# Altium PCB new_food_box_board.PcbDoc (part 2 of 2)
Units mil, origin at the board's own origin, x right, y up, seen from the top; angles counter-clockwise.
Board outline 2685 x 2040 mil, 4 copper layers (Top Layer, Int1 (GND), Int2 (PWR), Bottom Layer), stack 53.912 mil thick; 76 components, 57 nets, 292 pads, 22 vias.
Unrouted connection lines stored in the file: 200.
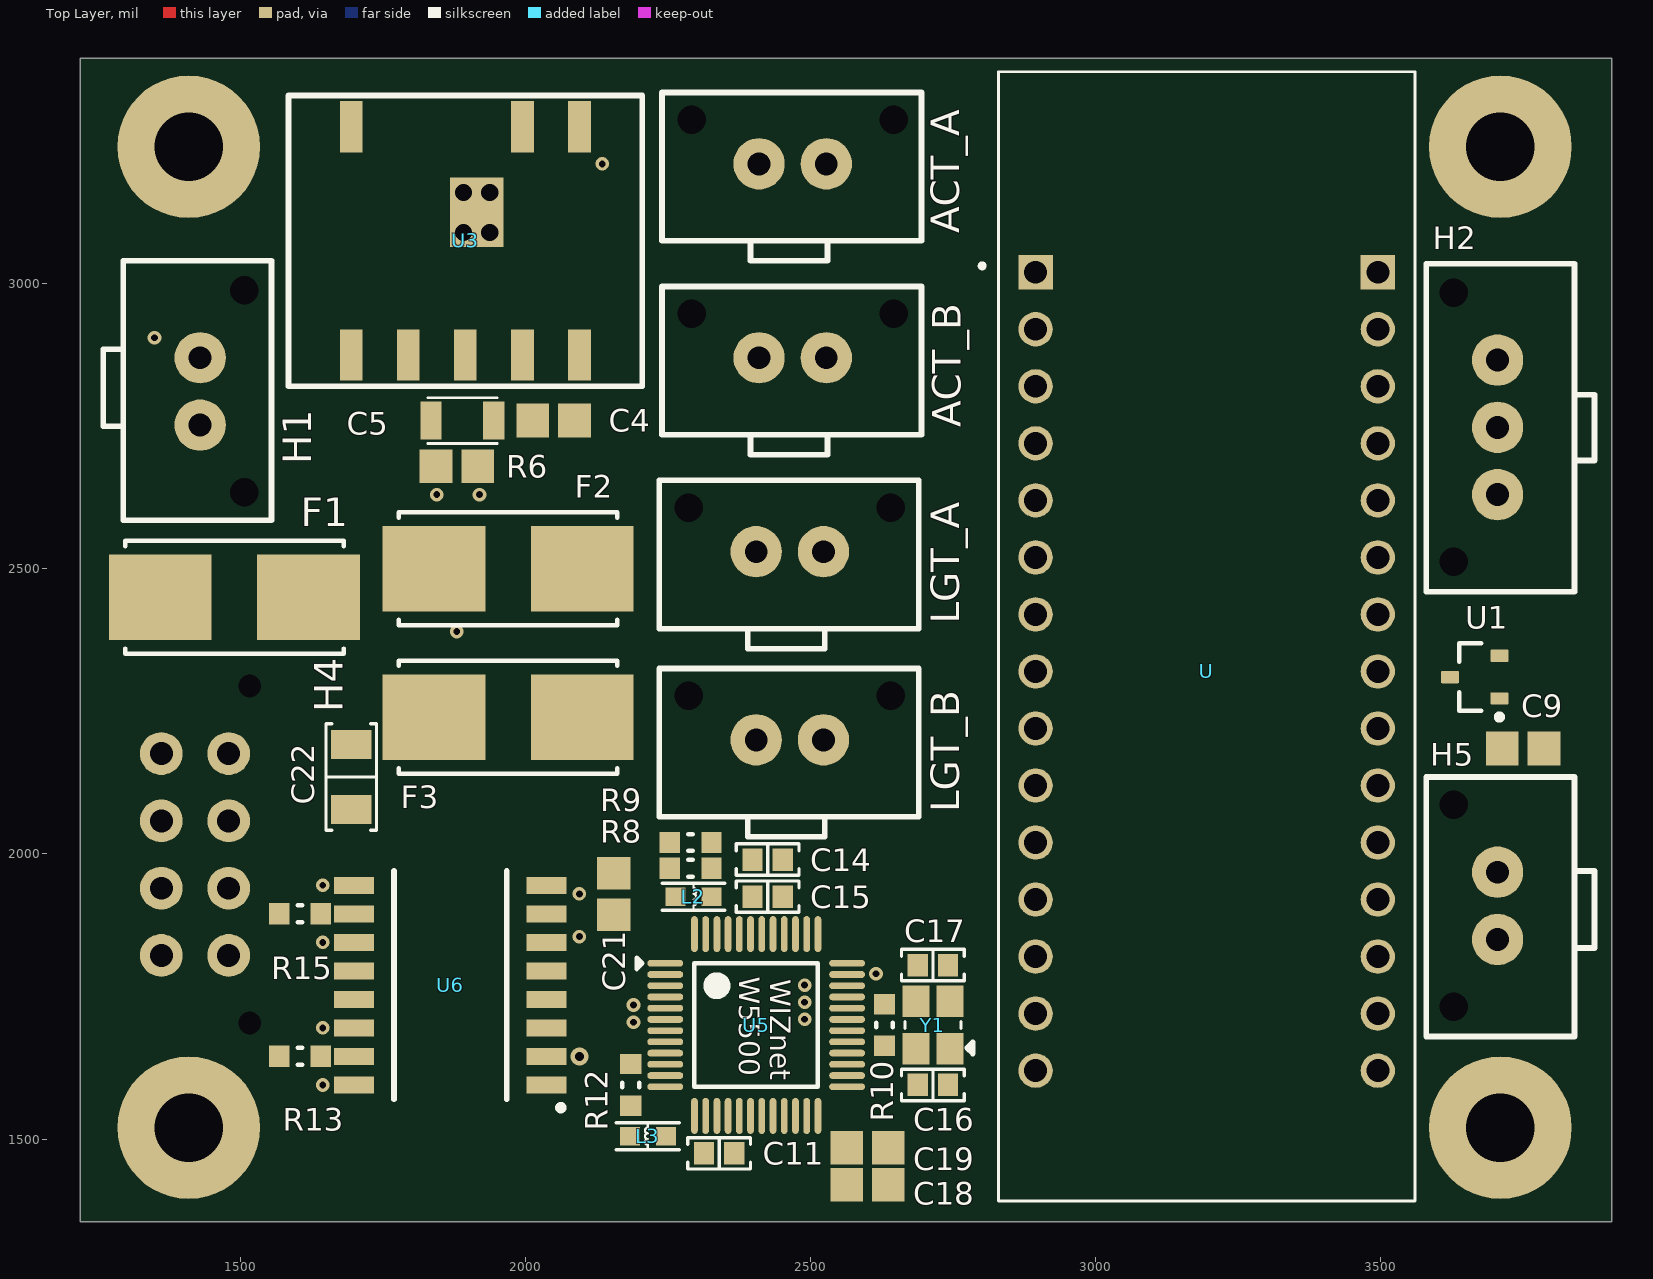
[diagram p0: Top Layer view]

## Part data (continued)
R2: "RES SMD 25.5K OHM 1% 1/10W 0603", Case Code (Imperial)=0603, Case Code (Metric)=1608, Manufacturer=Vishay, Manufacturer Part Number=CRCW060325K5FKEA, Max Operating Temperature=155°C, Max Power Dissipation=100mW, Min Operating Temperature=-55°C, Package Quantity=10, Resistance=25.5k, Supplier Part Number 1=541-25.5KHCT-ND, Temperature Coefficient=100ppm/°C, Tolerance=1%, Voltage Rating=75V, Case/Package=0603, Category="Chip SMD Resistors", ComponentLink1Description=https://datasheet.ciiva.com/11810/0900766b80d98afc-11810483.pdf?src-supplier=RSComponents, ComponentLink1URL=https://datasheet.ciiva.com/11810/0900766b80d98afc-11810483.pdf?src-supplier=RSComponents, ComponentLink2Description=https://datasheet.ciiva.com/2465/dcrcwe3-2465664.pdf?src-supplier=Digi-Key, ComponentLink2URL=https://datasheet.ciiva.com/2465/dcrcwe3-2465664.pdf?src-supplier=Digi-Key, ComponentLink3Description=https://datasheet.ciiva.com/2465/dcrcwe3-2465665.pdf?src-supplier=Digi-Key, ComponentLink3URL=https://datasheet.ciiva.com/2465/dcrcwe3-2465665.pdf?src-supplier=Digi-Key, ComponentLink4Description=https://datasheet.ciiva.com/3257/dcrcwe3-3257318.pdf?src-supplier=Avnet, ComponentLink4URL=https://datasheet.ciiva.com/3257/dcrcwe3-3257318.pdf?src-supplier=Avnet, ComponentLink5Description=https://datasheet.ciiva.com/3257/dcrcwe3-3257319.pdf?src-supplier=Avnet, ComponentLink5URL=https://datasheet.ciiva.com/3257/dcrcwe3-3257319.pdf?src-supplier=Avnet, ComponentLink6Description=https://datasheet.ciiva.com/16202/dcrcwe3-16202503.pdf?src-supplier=Future+Electronics, ComponentLink6URL=https://datasheet.ciiva.com/16202/dcrcwe3-16202503.pdf?src-supplier=Future+Electronics, ComponentLink7Description=https://datasheet.ciiva.com/7173/1635184-7173016.pdf?src-supplier=Newark, ComponentLink7URL=https://datasheet.ciiva.com/7173/1635184-7173016.pdf?src-supplier=Newark, ComponentLink8Description=https://datasheet.ciiva.com/16882/dcrcwe3-16882729.pdf?src-supplier=Avnet+Europe, ComponentLink8URL=https://datasheet.ciiva.com/16882/dcrcwe3-16882729.pdf?src-supplier=Avnet+Europe, ComponentLink9Description=https://datasheet.ciiva.com/22675/1847332-22675962.pdf?src-supplier=Element14, ComponentLink9URL=https://datasheet.ciiva.com/22675/1847332-22675962.pdf?src-supplier=Element14, ComponentLink10Description=https://datasheet.ciiva.com/22702/1697337-22702891.pdf?src-supplier=Element14, ComponentLink10URL=https://datasheet.ciiva.com/22702/1697337-22702891.pdf?src-supplier=Element14, ComponentLink11Description=https://datasheet.ciiva.com/22869/70201119-22869452.pdf?src-supplier=Allied+Electronics, ComponentLink11URL=https://datasheet.ciiva.com/22869/70201119-22869452.pdf?src-supplier=Allied+Electronics, ComponentLink12Description=https://datasheet.ciiva.com/2465/dcrcwe3-2465663.pdf?src-supplier=Digi-Key, ComponentLink12URL=https://datasheet.ciiva.com/2465/dcrcwe3-2465663.pdf?src-supplier=Digi-Key, ComponentLink13Description=https://datasheet.ciiva.com/5541/dcrcwe3-109170-5541965.pdf?src-supplier=Mouser, ComponentLink13URL=https://datasheet.ciiva.com/5541/dcrcwe3-109170-5541965.pdf?src-supplier=Mouser, Composition="Thick Film", Contact Plating=Tin, Depth=0.85mm, Features="Automotive AEC-Q200", Height=0.45mm, Lead Free="Lead Free", Length=1.55mm, Military Standard=Not, Number of Pins=2, Number of Terminations=2, Packaging="Tape and Reel", Power Rating=100mW, Pricing 1="1=0.10000, 10=0.03400, 100=0.01390, 1000=0.00623, 2500=0.00540 (USD)", Radiation Hardening=No, REACH SVHC=Unknown, Supplier 1=Digi-Key, Termination=SMD/SMT, Voltage Rating (DC)=75V, Weight=7.1E-05oz, Width=0.033inch, Working Voltage=75V
R3: "Res Thick Film 0603 13K Ohm 1% 1/10W 100ppm/C Molded SMD SMD Paper T/R", Case Code (Imperial)=0603, Case Code (Metric)=1608, Manufacturer="Vishay Dale", Manufacturer Part Number=CRCW060313K0FKTA, Max Operating Temperature=155°C, Max Power Dissipation=100mW, Min Operating Temperature=-55°C, Package Quantity=5000, Resistance=13k, Supplier Part Number 1=541-CRCW060313K0FKTACT-ND, Temperature Coefficient=100ppm/°C, Tolerance=1%, Voltage Rating=75V, Case/Package=0603, Category="Chip SMD Resistors", ComponentLink1Description=https://datasheet.ciiva.com/15159/getdatasheetpartid-33120-15159398.pdf?src-supplier=Verical, ComponentLink1URL=https://datasheet.ciiva.com/15159/getdatasheetpartid-33120-15159398.pdf?src-supplier=Verical, ComponentLink2Description=https://datasheet.ciiva.com/2564/dcrcw-2564949.pdf?src-supplier=Digi-Key, ComponentLink2URL=https://datasheet.ciiva.com/2564/dcrcw-2564949.pdf?src-supplier=Digi-Key, ComponentLink3Description=https://datasheet.ciiva.com/9043/dcrcw-9043261.pdf?src-supplier=Avnet, ComponentLink3URL=https://datasheet.ciiva.com/9043/dcrcw-9043261.pdf?src-supplier=Avnet, Composition="Thick Film", Contact Plating=Tin,Lead, Depth=0.85mm, Features="Automotive AEC-Q200", Height=0.02inch, Lead Free="Contains Lead", Length=1.55mm, Military Standard=Not, Number of Pins=2, Number of Terminations=2, Packaging="Tape and Reel", Power Dissipation=100mW, Power Rating=100mW, Pricing 1="1=0.13000, 10=0.12000, 100=0.04620, 1000=0.02033, 2500=0.01756 (USD)", Radiation Hardening=No, REACH SVHC=Unknown, Supplier 1=Digi-Key, Voltage Rating (DC)=75V, Weight=7.1E-05oz, Width=0.85mm
R4 "R11_Box Actuator A" "R11_Box Actuator B" "R11_Light A" "R11_Light B": library part "RES 0603", "CRGCQ 0603 100R 5%", Case Code (Imperial)=0603, Case Code (Metric)=1608, Manufacturer="TE Connectivity", Manufacturer Part Number=CRGCQ0603J100R, Max Operating Temperature=155°C, Max Power Dissipation=100mW, Min Operating Temperature=-55°C, Resistance=100R, Supplier Part Number 1=A130085CT-ND, Temperature Coefficient=100ppm/°C, Tolerance=5%, Case/Package=0603, Category="Chip SMD Resistors", ComponentLink1Description=https://www.te.com/commerce/DocumentDelivery/DDEController?Action=srchrtrv&amp;DocNm=1773204-3&amp;DocType=DS&amp;DocLang=English&src-supplier=Digi-Key, ComponentLink1URL=https://www.te.com/commerce/DocumentDelivery/DDEController?Action=srchrtrv&amp;DocNm=1773204-3&amp;DocType=DS&amp;DocLang=English&src-supplier=Digi-Key, Composition="Thick Film", Features="Moisture Resistant,Automotive AEC-Q200", Number of Terminations=2, Packaging="Cut Tape", Pricing 1="1=0.10000, 10=0.02100, 100=0.00860, 1000=0.00387, 2500=0.00336 (USD)", Supplier 1=Digi-Key
R5 "R14_Box Actuator A" "R14_Box Actuator B" "R14_Light A" "R14_Light B": library part "RES 0603", "TE CONNECTIVITY - CRGCQ0603J10K - RES, 10K, 5%, 0603, THICK FILM", Case Code (Imperial)=0603, Case Code (Metric)=1608, Manufacturer="TE Connectivity", Manufacturer Part Number=CRGCQ0603J10K, Max Operating Temperature=155°C, Max Power Dissipation=100mW, Min Operating Temperature=-55°C, Resistance=10kR, Supplier Part Number 1=A130097CT-ND, Temperature Coefficient=100ppm/°C, Tolerance=5%, Case/Package=0603, Category="Chip SMD Resistors", ComponentLink1Description=https://4donline.ihs.com/images/VipMasterIC/IC/TYEL/TYEL-S-A0004929575/TYEL-S-A0004929575-1.pdf?hkey=52A5661711E402568146F3353EA87419&src-supplier=Farnell, ComponentLink1URL=https://4donline.ihs.com/images/VipMasterIC/IC/TYEL/TYEL-S-A0004929575/TYEL-S-A0004929575-1.pdf?hkey=52A5661711E402568146F3353EA87419&src-supplier=Farnell, ComponentLink2Description=https://4donline.ihs.com/images/VipMasterIC/IC/TYEL/TYEL-S-A0004929575/TYEL-S-A0004929575-1.pdf?hkey=52A5661711E402568146F3353EA87419&src-supplier=Newark, ComponentLink2URL=https://4donline.ihs.com/images/VipMasterIC/IC/TYEL/TYEL-S-A0004929575/TYEL-S-A0004929575-1.pdf?hkey=52A5661711E402568146F3353EA87419&src-supplier=Newark, ComponentLink3Description=https://www.te.com/commerce/DocumentDelivery/DDEController?Action=srchrtrv&amp;DocNm=1773204-3&amp;DocType=DS&amp;DocLang=English&src-supplier=Digi-Key, ComponentLink3URL=https://www.te.com/commerce/DocumentDelivery/DDEController?Action=srchrtrv&amp;DocNm=1773204-3&amp;DocType=DS&amp;DocLang=English&src-supplier=Digi-Key, ComponentLink4Description=http://www.te.com/commerce/DocumentDelivery/DDEController?Action=srchrtrv&DocNm=1773204-3&DocType=DS&DocLang=English&src-supplier=Digi-Key, ComponentLink4URL=http://www.te.com/commerce/DocumentDelivery/DDEController?Action=srchrtrv&DocNm=1773204-3&DocType=DS&DocLang=English&src-supplier=Digi-Key, Composition="Thick Film", Features="Moisture Resistant,Automotive AEC-Q200", Number of Terminations=2, Packaging="Tape and Reel", Pricing 1="1=0.10000, 10=0.02100, 100=0.00860, 1000=0.00387, 2500=0.00336 (USD)", Supplier 1=Digi-Key
R6: library part "RES 0603", "Resistor Thick Film 0.01Ohm 0.5% 0.5W 2-Pin 0805 T/R", Manufacturer=Panasonic, Manufacturer Part Number=ERJ-6CWDR010V, Supplier Part Number 1=P124401CT-ND, Pricing 1="1=0.65000, 10=0.48100, 25=0.39000, 50=0.33920, 100=0.27990, 250=0.24312, 500=0.19790, 1000=0.15696 (USD)", Supplier 1=Digi-Key
R7: library part "RES 0603", "CRGCQ 0603 100K 5%", Case Code (Imperial)=0603, Case Code (Metric)=1608, Manufacturer="TE Connectivity", Manufacturer Part Number=CRGCQ0603J100K, Max Operating Temperature=155°C, Max Power Dissipation=100mW, Min Operating Temperature=-55°C, Resistance=100k, Supplier Part Number 1=A130103CT-ND, Temperature Coefficient=100ppm/°C, Tolerance=5%, Case/Package=0603, Category="Chip SMD Resistors", ComponentLink1Description=https://www.te.com/commerce/DocumentDelivery/DDEController?Action=srchrtrv&amp;DocNm=1773204-3&amp;DocType=DS&amp;DocLang=English&src-supplier=Digi-Key, ComponentLink1URL=https://www.te.com/commerce/DocumentDelivery/DDEController?Action=srchrtrv&amp;DocNm=1773204-3&amp;DocType=DS&amp;DocLang=English&src-supplier=Digi-Key, ComponentLink2Description=https://4donline.ihs.com/images/VipMasterIC/IC/TYEL/TYEL-S-A0004929575/TYEL-S-A0004929575-1.pdf?hkey=52A5661711E402568146F3353EA87419&src-supplier=Farnell, ComponentLink2URL=https://4donline.ihs.com/images/VipMasterIC/IC/TYEL/TYEL-S-A0004929575/TYEL-S-A0004929575-1.pdf?hkey=52A5661711E402568146F3353EA87419&src-supplier=Farnell, ComponentLink3Description=https://4donline.ihs.com/images/VipMasterIC/IC/TYEL/TYEL-S-A0004929575/TYEL-S-A0004929575-1.pdf?hkey=52A5661711E402568146F3353EA87419&src-supplier=Newark, ComponentLink3URL=https://4donline.ihs.com/images/VipMasterIC/IC/TYEL/TYEL-S-A0004929575/TYEL-S-A0004929575-1.pdf?hkey=52A5661711E402568146F3353EA87419&src-supplier=Newark, ComponentLink4Description=https://4donline.ihs.com/images/VipMasterIC/IC/TYEL/TYEL-S-A0004929575/TYEL-S-A0004929575-1.pdf?hkey=52A5661711E402568146F3353EA87419&src-supplier=Element14, ComponentLink4URL=https://4donline.ihs.com/images/VipMasterIC/IC/TYEL/TYEL-S-A0004929575/TYEL-S-A0004929575-1.pdf?hkey=52A5661711E402568146F3353EA87419&src-supplier=Element14, Composition="Thick Film", Features="Moisture Resistant,Automotive AEC-Q200", Number of Terminations=2, Packaging="Tape and Reel", Pricing 1="1=0.10000, 10=0.02100, 100=0.00860, 1000=0.00387, 2500=0.00336 (USD)", Supplier 1=Digi-Key
R8 R9: library part "RES 0603", "SMD Resistor, Thick film 4.7 kOhm,  ±  1 %, 0603, CRCW06034K70FKEA, Vishay", Case Code (Imperial)=0603, Case Code (Metric)=1608, Manufacturer=Vishay, Manufacturer Part Number=CRCW06034K70FKEA, Max Operating Temperature=155°C, Min Operating Temperature=-55°C, Package Quantity=5000, Power Rating=100mW, Resistance=4.7kR, Supplier Part Number 1=541-4.70KHCT-ND, Temperature Coefficient=100ppm/°C, Tolerance=1%, Voltage Rating=75V, Case/Package=0603, Category="Chip SMD Resistors", ComponentLink1Description=https://datasheet.ciiva.com/11809/0900766b80d98afc-11809859.pdf?src-supplier=RSComponents, ComponentLink1URL=https://datasheet.ciiva.com/11809/0900766b80d98afc-11809859.pdf?src-supplier=RSComponents, ComponentLink2Description=https://datasheet.ciiva.com/16520/dcrcwe3-16520616.pdf?src-supplier=Avnet+Asia, ComponentLink2URL=https://datasheet.ciiva.com/16520/dcrcwe3-16520616.pdf?src-supplier=Avnet+Asia, ComponentLink3Description=https://datasheet.ciiva.com/8079/1697337-8079646.pdf?src-supplier=Element14, ComponentLink3URL=https://datasheet.ciiva.com/8079/1697337-8079646.pdf?src-supplier=Element14, ComponentLink4Description=https://datasheet.ciiva.com/26314/fld-crcw-e3-data-en-26314735.pdf?src-supplier=Distrelec, ComponentLink4URL=https://datasheet.ciiva.com/26314/fld-crcw-e3-data-en-26314735.pdf?src-supplier=Distrelec, ComponentLink5Description=https://datasheet.ciiva.com/15159/getdatasheetpartid-33073-15159382.pdf?src-supplier=Verical, ComponentLink5URL=https://datasheet.ciiva.com/15159/getdatasheetpartid-33073-15159382.pdf?src-supplier=Verical, ComponentLink6Description=https://datasheet.ciiva.com/16199/dcrcwe3-16199366.pdf?src-supplier=Future+Electronics, ComponentLink6URL=https://datasheet.ciiva.com/16199/dcrcwe3-16199366.pdf?src-supplier=Future+Electronics, ComponentLink7Description=https://datasheet.ciiva.com/16764/70201119-16764918.pdf?src-supplier=Allied+Electronics, ComponentLink7URL=https://datasheet.ciiva.com/16764/70201119-16764918.pdf?src-supplier=Allied+Electronics, ComponentLink8Description=https://datasheet.ciiva.com/16724/70201119-16724106.pdf?src-supplier=Allied+Electronics, ComponentLink8URL=https://datasheet.ciiva.com/16724/70201119-16724106.pdf?src-supplier=Allied+Electronics, Composition="Thick Film", Contact Plating=Tin, Depth=0.85mm, Height=0.45mm, Lead Free="Lead Free", Length=1.55mm, Military Standard=Not, Mount="Surface Mount", Packaging="Tape and Reel", REACH SVHC=Unknown, Supplier 1=Digi-Key, Termination=SMD/SMT, Voltage Rating (DC)=75V, Weight=7.1E-05oz, Width=0.85mm
R10: library part "RES 0603", "Thick Film Chip Resistor", Case Code (Imperial)=0603, Case Code (Metric)=1608, Manufacturer=Vishay, Manufacturer Part Number=CRCW06031M00FKEA, Max Operating Temperature=155°C, Max Power Dissipation=100mW, Min Operating Temperature=-55°C, Package Quantity=10, Resistance=1MR, Supplier Part Number 1=541-1.00MHCT-ND, Temperature Coefficient=100ppm/°C, Tolerance=1%, Voltage Rating=75V, Case/Package=0603, Category="Chip SMD Resistors", ComponentLink1Description=https://datasheet.ciiva.com/11809/0900766b80d98afc-11809074.pdf?src-supplier=RSComponents, ComponentLink1URL=https://datasheet.ciiva.com/11809/0900766b80d98afc-11809074.pdf?src-supplier=RSComponents, ComponentLink2Description=https://datasheet.ciiva.com/2465/dcrcwe3-2465549.pdf?src-supplier=Digi-Key, ComponentLink2URL=https://datasheet.ciiva.com/2465/dcrcwe3-2465549.pdf?src-supplier=Digi-Key, ComponentLink3Description=https://datasheet.ciiva.com/16311/dcrcwe3-16311533.pdf?src-supplier=Future+Electronics, ComponentLink3URL=https://datasheet.ciiva.com/16311/dcrcwe3-16311533.pdf?src-supplier=Future+Electronics, ComponentLink4Description=https://datasheet.ciiva.com/2465/dcrcwe3-2465550.pdf?src-supplier=Digi-Key, ComponentLink4URL=https://datasheet.ciiva.com/2465/dcrcwe3-2465550.pdf?src-supplier=Digi-Key, ComponentLink5Description=https://datasheet.ciiva.com/26314/fld-crcw-e3-data-en-26314645.pdf?src-supplier=Distrelec, ComponentLink5URL=https://datasheet.ciiva.com/26314/fld-crcw-e3-data-en-26314645.pdf?src-supplier=Distrelec, ComponentLink6Description=https://datasheet.ciiva.com/7841/1720486-7841822.pdf?src-supplier=Element14, ComponentLink6URL=https://datasheet.ciiva.com/7841/1720486-7841822.pdf?src-supplier=Element14, ComponentLink7Description=https://datasheet.ciiva.com/2465/dcrcwe3-2465551.pdf?src-supplier=Digi-Key, ComponentLink7URL=https://datasheet.ciiva.com/2465/dcrcwe3-2465551.pdf?src-supplier=Digi-Key, ComponentLink8Description=https://datasheet.ciiva.com/7841/125364-7841823.pdf?src-supplier=Element14, ComponentLink8URL=https://datasheet.ciiva.com/7841/125364-7841823.pdf?src-supplier=Element14, Composition="Thick Film", Contact Plating=Tin, Depth=0.85mm, Features="Automotive AEC-Q200", Height=0.45mm, Lead Free="Lead Free", Length=1.55mm, Military Standard=Not, Mount="Surface Mount", Number of Pins=2, Number of Terminations=2, Packaging="Tape and Reel", Power Rating=100mW, Radiation Hardening=No, REACH SVHC=Unknown, Supplier 1=Digi-Key, Termination=SMD/SMT, Voltage Rating (DC)=75V, Weight=7.1E-05oz, Width=0.85mm
R12: library part "RES 0603", "Res Thick Film 0603 12.4K Ohm 1% 1/10W ±100ppm/°C Molded SMD SMD Paper T/R", Case Code (Imperial)=0603, Case Code (Metric)=1608, Manufacturer=Vishay, Manufacturer Part Number=CRCW0603-12K4FKEA, Max Operating Temperature=155°C, Max Power Dissipation=100mW, Min Operating Temperature=-55°C, Package Quantity=10, Resistance=12.4kR, Supplier Part Number 1=541-12.4KHTR-ND, Temperature Coefficient=100ppm/°C, Tolerance=1%, Voltage Rating=75V, Case/Package=0603, Category="Chip SMD Resistors", ComponentLink1Description=https://datasheet.ciiva.com/11809/0900766b80d98afc-11809065.pdf?src-supplier=RSComponents, ComponentLink1URL=https://datasheet.ciiva.com/11809/0900766b80d98afc-11809065.pdf?src-supplier=RSComponents, ComponentLink2Description=https://datasheet.ciiva.com/16215/dcrcwe3-16215547.pdf?src-supplier=Future+Electronics, ComponentLink2URL=https://datasheet.ciiva.com/16215/dcrcwe3-16215547.pdf?src-supplier=Future+Electronics, ComponentLink3Description=https://datasheet.ciiva.com/16515/dcrcwe3-16515035.pdf?src-supplier=Avnet+Asia, ComponentLink3URL=https://datasheet.ciiva.com/16515/dcrcwe3-16515035.pdf?src-supplier=Avnet+Asia, ComponentLink4Description=https://datasheet.ciiva.com/2465/dcrcwe3-2465806.pdf?src-supplier=Digi-Key, ComponentLink4URL=https://datasheet.ciiva.com/2465/dcrcwe3-2465806.pdf?src-supplier=Digi-Key, ComponentLink5Description=https://datasheet.ciiva.com/16767/70201119-16767174.pdf?src-supplier=Allied+Electronics, ComponentLink5URL=https://datasheet.ciiva.com/16767/70201119-16767174.pdf?src-supplier=Allied+Electronics, ComponentLink6Description=https://datasheet.ciiva.com/5543/dcrcwe3-109170-5543127.pdf?src-supplier=Mouser, ComponentLink6URL=https://datasheet.ciiva.com/5543/dcrcwe3-109170-5543127.pdf?src-supplier=Mouser, ComponentLink7Description=https://datasheet.ciiva.com/16778/70201119-16778295.pdf?src-supplier=Allied+Electronics, ComponentLink7URL=https://datasheet.ciiva.com/16778/70201119-16778295.pdf?src-supplier=Allied+Electronics, ComponentLink8Description=https://datasheet.ciiva.com/3257/dcrcwe3-3257002.pdf?src-supplier=Avnet, ComponentLink8URL=https://datasheet.ciiva.com/3257/dcrcwe3-3257002.pdf?src-supplier=Avnet, ComponentLink9Description=https://datasheet.ciiva.com/2465/dcrcwe3-2465804.pdf?src-supplier=Digi-Key, ComponentLink9URL=https://datasheet.ciiva.com/2465/dcrcwe3-2465804.pdf?src-supplier=Digi-Key, ComponentLink10Description=https://datasheet.ciiva.com/2465/dcrcwe3-2465805.pdf?src-supplier=Digi-Key, ComponentLink10URL=https://datasheet.ciiva.com/2465/dcrcwe3-2465805.pdf?src-supplier=Digi-Key, Composition="Thick Film", Contact Plating=Tin, Depth=0.85mm, Features="Automotive AEC-Q200", Height=0.45mm, Lead Free="Lead Free", Length=1.55mm, Military Standard=Not, Mount="Surface Mount", Number of Pins=2, Number of Terminations=2, Packaging="Tape and Reel", Power Rating=100mW, Radiation Hardening=No, REACH SVHC=Unknown, Supplier 1=Digi-Key, Termination=SMD/SMT, Voltage Rating (DC)=75V, Weight=7.1E-05oz, Width=0.85mm
R13 R15: library part "RES 0603", "VISHAY - CRCW060375R0FKEA - RES, 75R, 1%, 0.1W, 0603, THICK FILM", Case Code (Imperial)=0603, Case Code (Metric)=1608, Manufacturer=Vishay, Manufacturer Part Number=CRCW060375R0FKEA, Max Operating Temperature=155°C, Min Operating Temperature=-55°C, Package Quantity=5000, Power Rating=100mW, Resistance=75R, Supplier Part Number 1=541-75.0HCT-ND, Temperature Coefficient=100ppm/°C, Tolerance=1%, Voltage Rating=75V, Case/Package=0603, Category="Chip SMD Resistors", ComponentLink1Description=https://datasheet.ciiva.com/11809/0900766b80d98afc-11809100.pdf?src-supplier=RSComponents, ComponentLink1URL=https://datasheet.ciiva.com/11809/0900766b80d98afc-11809100.pdf?src-supplier=RSComponents, ComponentLink2Description=https://datasheet.ciiva.com/7673/1697337-7673323.pdf?src-supplier=Element14, ComponentLink2URL=https://datasheet.ciiva.com/7673/1697337-7673323.pdf?src-supplier=Element14, ComponentLink3Description=https://datasheet.ciiva.com/16852/dcrcwe3-16852747.pdf?src-supplier=Avnet+Europe, ComponentLink3URL=https://datasheet.ciiva.com/16852/dcrcwe3-16852747.pdf?src-supplier=Avnet+Europe, ComponentLink4Description=https://datasheet.ciiva.com/3257/dcrcwe3-3257884.pdf?src-supplier=Avnet, ComponentLink4URL=https://datasheet.ciiva.com/3257/dcrcwe3-3257884.pdf?src-supplier=Avnet, ComponentLink5Description=https://datasheet.ciiva.com/3257/dcrcwe3-3257885.pdf?src-supplier=Avnet, ComponentLink5URL=https://datasheet.ciiva.com/3257/dcrcwe3-3257885.pdf?src-supplier=Avnet, ComponentLink6Description=https://datasheet.ciiva.com/16780/70201119-16780254.pdf?src-supplier=Allied+Electronics, ComponentLink6URL=https://datasheet.ciiva.com/16780/70201119-16780254.pdf?src-supplier=Allied+Electronics, ComponentLink7Description=https://datasheet.ciiva.com/5541/dcrcwe3-109170-5541910.pdf?src-supplier=Mouser, ComponentLink7URL=https://datasheet.ciiva.com/5541/dcrcwe3-109170-5541910.pdf?src-supplier=Mouser, ComponentLink8Description=https://datasheet.ciiva.com/16199/dcrcwe3-16199141.pdf?src-supplier=Future+Electronics, ComponentLink8URL=https://datasheet.ciiva.com/16199/dcrcwe3-16199141.pdf?src-supplier=Future+Electronics, ComponentLink9Description=https://datasheet.ciiva.com/16722/70201119-16722522.pdf?src-supplier=Allied+Electronics, ComponentLink9URL=https://datasheet.ciiva.com/16722/70201119-16722522.pdf?src-supplier=Allied+Electronics, ComponentLink10Description=https://datasheet.ciiva.com/7673/1697337-7673471.pdf?src-supplier=Element14, ComponentLink10URL=https://datasheet.ciiva.com/7673/1697337-7673471.pdf?src-supplier=Element14, Composition="Thick Film", Contact Plating=Tin, Depth=0.85mm, Height=0.45mm, Lead Free="Lead Free", Length=1.55mm, Military Standard=Not, Number of Terminations=2, Packaging="Tape and Reel", REACH SVHC=Unknown, Supplier 1=Digi-Key, Termination=SMD/SMT, Voltage Rating (DC)=75V, Weight=7.1E-05oz, Width=0.85mm, Working Voltage=75V
U: "STM32L432KC, mbed-Enabled Development Nucleo-32 STM32L4 ARMÂ® CortexÂ®-M4 MCU 32-Bit Embedded Evaluation Board", Package=None, Availability=Unavailable, MF=STMicroelectronics, MP=NUCLEO-L432KC, Price=None, SnapEDA_Link=https://www.snapeda.com/parts/NUCLEO-L432KC/STMicroelectronics/view-part/628463/?ref=snap
U1: library part CMP-0066-00260-3, "2.7V Temperature Sensor, 3-pin SOT-23, Pb-Free", Manufacturer="Texas Instruments", PackageTopMarking=T1C*XTT, PowerWise=N, ComponentLink1Description="Datasheet URL", ComponentLink1URL=http://www.ti.com/general/docs/lit/getliterature.tsp?genericPartNumber=LM61&fileType=pdf, CompType="Temp Sensor IC", PackageDescription="Molded SOT-23, .115 x .051 x .037in Body, 3 Lead, .075 in Pitch", PackageReference=DBZ0003A, PinCount=3, RoHS=Y
U5: "WIZnet W5500"
Y1: library part OSC-82J0626-25MHz, "CRYSTAL 25.0000MHZ 18PF SMD", Case/Package=SMD/SMT, ESR (Equivalent Series Resistance)=50R, Frequency Stability=30ppm, Frequency Tolerance=50ppm, Load Capacitance=18pF, Manufacturer=Epson, Manufacturer Part Number=FA-23825.0000MB-C3, Max Operating Temperature=70°C, Min Operating Temperature=-20°C, Package Quantity=250, Supplier Part Number 1=SER3691CT-ND, Category=Crystals, ComponentLink1Description=http://www.mouser.com/ds/2/137/A-238_en-932914.pdf?src-supplier=Mouser, ComponentLink1URL=http://www.mouser.com/ds/2/137/A-238_en-932914.pdf?src-supplier=Mouser, ComponentLink2Description=https://www5.epsondevice.com/en/information/support/pdf/june_2018_psc_masterbook.pdf?src-supplier=Digi-Key, ComponentLink2URL=https://www5.epsondevice.com/en/information/support/pdf/june_2018_psc_masterbook.pdf?src-supplier=Digi-Key, Frequency=25MHz, Height=0.028inch, Lead Free="Lead Free", Length=0.126inch, Mount="Surface Mount", Packaging="Tape and Reel", Supplier 1=Digi-Key, Termination=SMD/SMT, Tolerance=50ppm, Weight=0.000564oz, Width=0.098inch

## Free pads (board coordinates)
  round 250 hole 120: 0(1410,1520) 0(1410,3240) 0(3710,1520) 0(3710,3240)

## Via types
v1: diameter 24, hole 12, Top Layer to Bottom Layer, 17 vias
v2: diameter 30, hole 30, Top Layer to Bottom Layer, 4 vias
v3: diameter 32, hole 16, Top Layer to Bottom Layer, 1 vias

## Nets (pads, with @x,y where several pads share a name; then routed paths per layer and width w, separated by ;. In a path a pad name is that pad's centre, name@x,y a point inside that pad or via, vN(x,y) a via of type N, cw(c..) or ccw(c..) an arc to the next point about the centre after c; other vN are vias at no path point)
3.3V: C13.1 C14.2 C15.2 L2.2 R8.2 R9.2 U5.28 U5.43 U5.44 U5.45
3.3V_A: C11.2 C12.1 L2.1 U5.4 U5.8 U5.11 U5.15 U5.17 U5.21
3V3: C4.2 C9.2 C10.2 H2.1 R7.2 U1.1 U3.4 U4.3 U.CN4_14
6V: C6.2 C7.2 D2.2 H1.1 L1.2 R1.2
  other v1: 1350,2905 2135,3210
24V: C2.2 C3.2 C5.2 F1.2 F2.1 F3.1 R6.2 U2.2 U3.3 U4.4
  other v1: 1845,2630
AGND: C11.1 C12.2 L3.1 U5.3 U5.9 U5.14 U5.16 U5.19 U5.48
CHP_RX_N: U5.5 U6.8
  other v1: 2190,1735 2095,1930
CHP_RX_P: U5.6 U6.6
  other v1: 2190,1705 2095,1855
CHP_TX_N: U5.1 U6.3
CHP_TX_P: U5.2 U6.1
CS: R8.1 U5.32 U.CN3_13
  other v1: 2490,1710
ETH_RX_N: H4.3 U6.9
  other v1: 1645,1945
ETH_RX_P: H4.2 U6.11
  other v1: 1645,1845
ETH_TX_N: H4.7 U6.14
  other v1: 1645,1695
ETH_TX_P: H4.6 U6.16
  other v1: 1645,1595
FB: R1.1 R3.2 U2.5
GND: "Q4_Box Actuator A.3" "Q4_Box Actuator B.3" "Q4_Light A.3" "Q4_Light B.3" "R14_Box Actuator A.1" "R14_Box Actuator B.1" "R14_Light A.1" "R14_Light B.1" C2.1 C3.1 C4.1 C5.1 C6.1 C7.1 C8.1 C9.1 C10.1 C13.2 C14.1 C15.1 C16.1 C17.1 C18.1 C19.1 C20.1 C21.1 C22.1 D1.1 H2.3 H4.1 H4.5 H5.2 L3.2 Q1.3 R2.1 R3.1 R5.1 R12.1 U1.3 U2.7 U3.2 U4.1 U5.23 U5.29 U5.38 U5.39 U5.40 U5.41 U5.42 U.CN3_4 U.CN4_2 Y1.2 Y1.4
  other v2: 1891.81,3090 1937.81,3090 1891.81,3160 1937.81,3160
MISO: U5.34 U.CN3_15
  other v1: 2490,1770
MOSI: U5.35 U.CN3_14
  other v1: 2615,1790
NetC1_1: C1.1 U2.1
NetC1_2: C1.2 D1.2 L1.1 U2.8
NetC8_2: C8.2 U2.6
NetC18_2: C18.2 U5.20
NetC19_2: C19.2 U5.22
NetC20_2: C20.2 C21.2 U6.2 U6.7
  other v3: 2095,1645
NetC22_2: C22.2 R13.1 R15.1
NetD2_1: D2.1 H1.2 Q1.1
"NetD5_Box Actuator A_1": "D5_Box Actuator A.1" "Q4_Box Actuator A.1" ACT_A.2
"NetD5_Box Actuator B_1": "D5_Box Actuator B.1" "Q4_Box Actuator B.1" ACT_B.2
"NetD5_Light A_1": "D5_Light A.1" "Q4_Light A.1" LGT_A.2
"NetD5_Light A_2": "D5_Light A.2" F2.2 LGT_A.1
"NetD5_Light B_1": "D5_Light B.1" "Q4_Light B.1" LGT_B.2
"NetD5_Light B_2": "D5_Light B.2" F3.2 LGT_B.1
NetF1_1: F1.1 H4.4 H4.8
NetH2_2: H2.2 U.CN4_5
NetH5_1: H5.1 R7.1 U.CN3_5
NetQ1_2: Q1.2 R4.1
"NetQ4_Box Actuator A_2": "Q4_Box Actuator A.2" "R11_Box Actuator A.1"
"NetQ4_Box Actuator B_2": "Q4_Box Actuator B.2" "R11_Box Actuator B.1"
"NetQ4_Light A_2": "Q4_Light A.2" "R11_Light A.1"
"NetQ4_Light B_2": "Q4_Light B.2" "R11_Light B.1"
NetR2_2: R2.2 U2.4
NetR4_2: R4.2 R5.2 U.CN3_7
NetR9_1: R9.1 U5.37
"NetR11_Box Actuator A_2": "R11_Box Actuator A.2" "R14_Box Actuator A.2" U.CN3_10
"NetR11_Box Actuator B_2": "R11_Box Actuator B.2" "R14_Box Actuator B.2" U.CN3_11
"NetR11_Light A_2": "R11_Light A.2" "R14_Light A.2" U.CN4_11
"NetR11_Light B_2": "R11_Light B.2" "R14_Light B.2" U.CN4_12
NetR12_2: R12.2 U5.10
NetR13_2: R13.2 U6.15
NetR15_2: R15.2 U6.10
NetU1_2: U1.2 U.CN4_6
NetU4_2: U4.2 U.CN4_10
  other v1: 1880,2390
SCLK: U5.33 U.CN4_15
  other v1: 2490,1740
VACT: "D5_Box Actuator A.2" "D5_Box Actuator B.2" ACT_A.1 ACT_B.1 R6.1 U4.5
  other v1: 1920,2630
XI: C16.2 R10.1 U5.30 Y1.1
XO: C17.2 R10.2 U5.31 Y1.3
pads on no net: ACT_A.0 ACT_B.0 H1.0 H2.0 H4.0 H5.0 LGT_A.0 LGT_B.0 U2.3 U3.1 U3.5 U5.7 U5.12 U5.13 U5.18 U5.24 U5.25 U5.26 U5.27 U5.36 U5.46 U5.47 U6.4 U6.5 U6.12 U6.13 U.CN3_1 U.CN3_2 U.CN3_3 U.CN3_6 U.CN3_8 U.CN3_9 U.CN3_12 U.CN4_1 U.CN4_3 U.CN4_4 U.CN4_7 U.CN4_8 U.CN4_9 U.CN4_13

## Silkscreen, mask and mechanical layers (free items; w line width, h text height)
Mechanical 1:
  lines w10: 1225,1360 3900,1360 3900,3390 1225,3390 1225,1360

## Dimensions
1225,3390 to 3900,3390 on Mechanical 1
3900,3390 to 3900,1360 on Mechanical 1

## Text inside footprints (layer, text, board x,y; h text height)
U5: Top Overlay "WIZnet" at 2430,1780 h36 r270